# Altium PCB 2014_CARTE_PUISSANCE.PCBDOC
Units mil, origin at the board's own origin, x right, y up, seen from the top; angles counter-clockwise.
Board outline 3149.61 x 1181.1 mil, 4 copper layers (1-TOP, 2-PSSCE, 3-GND, 4-BOTTOM); 30 components, 19 nets, 83 pads, 90 vias.
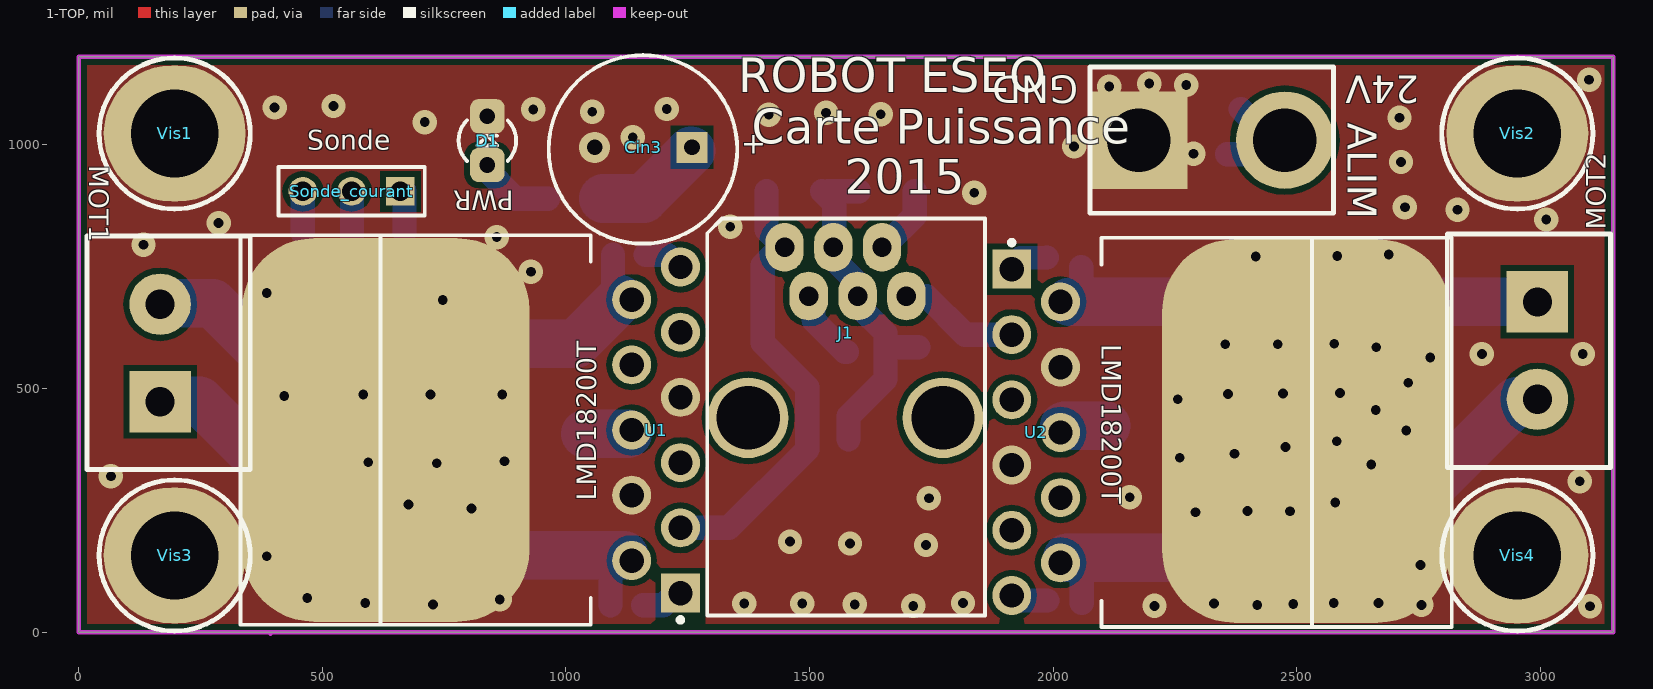
[diagram p0: 1-TOP view]
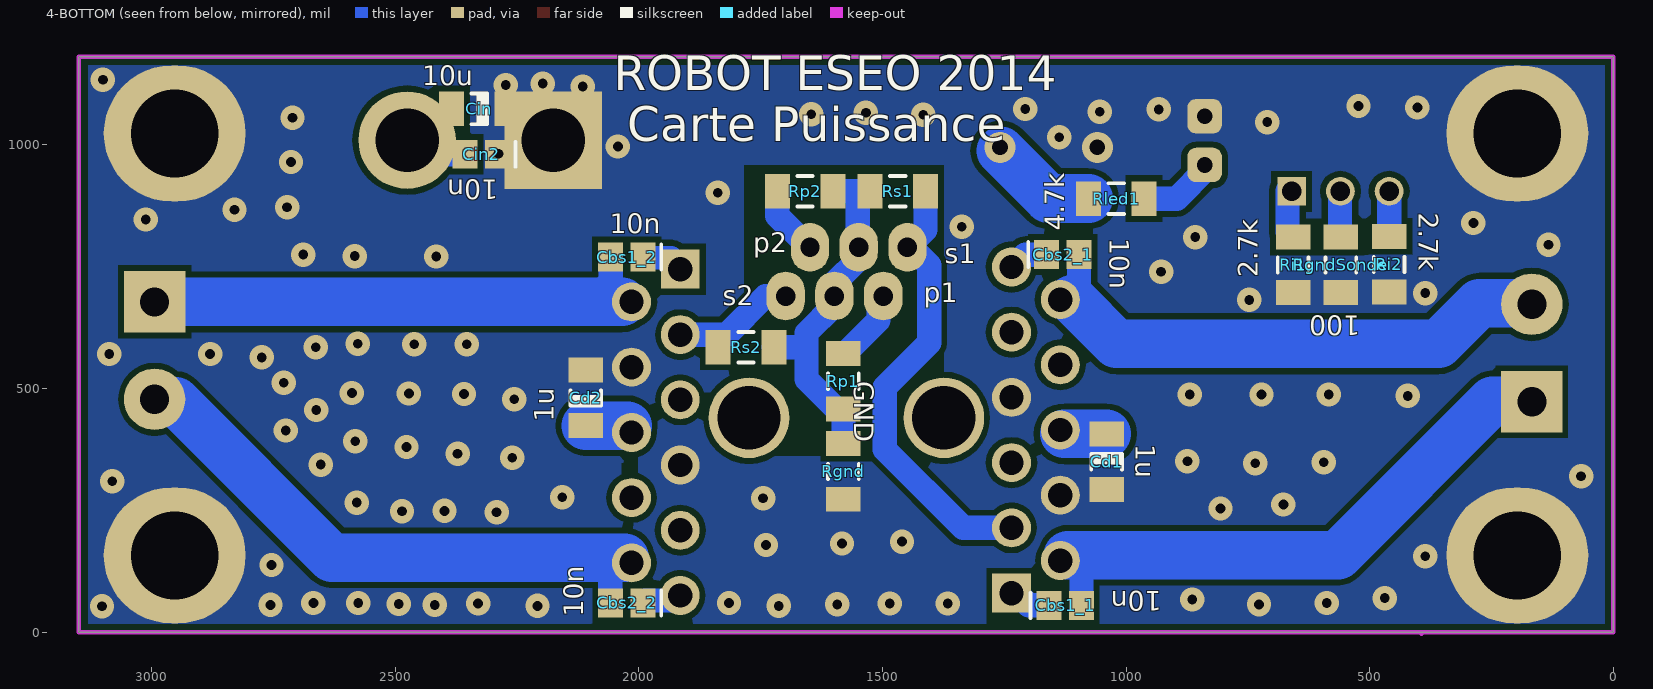
[diagram p1: 4-BOTTOM view, seen from below]
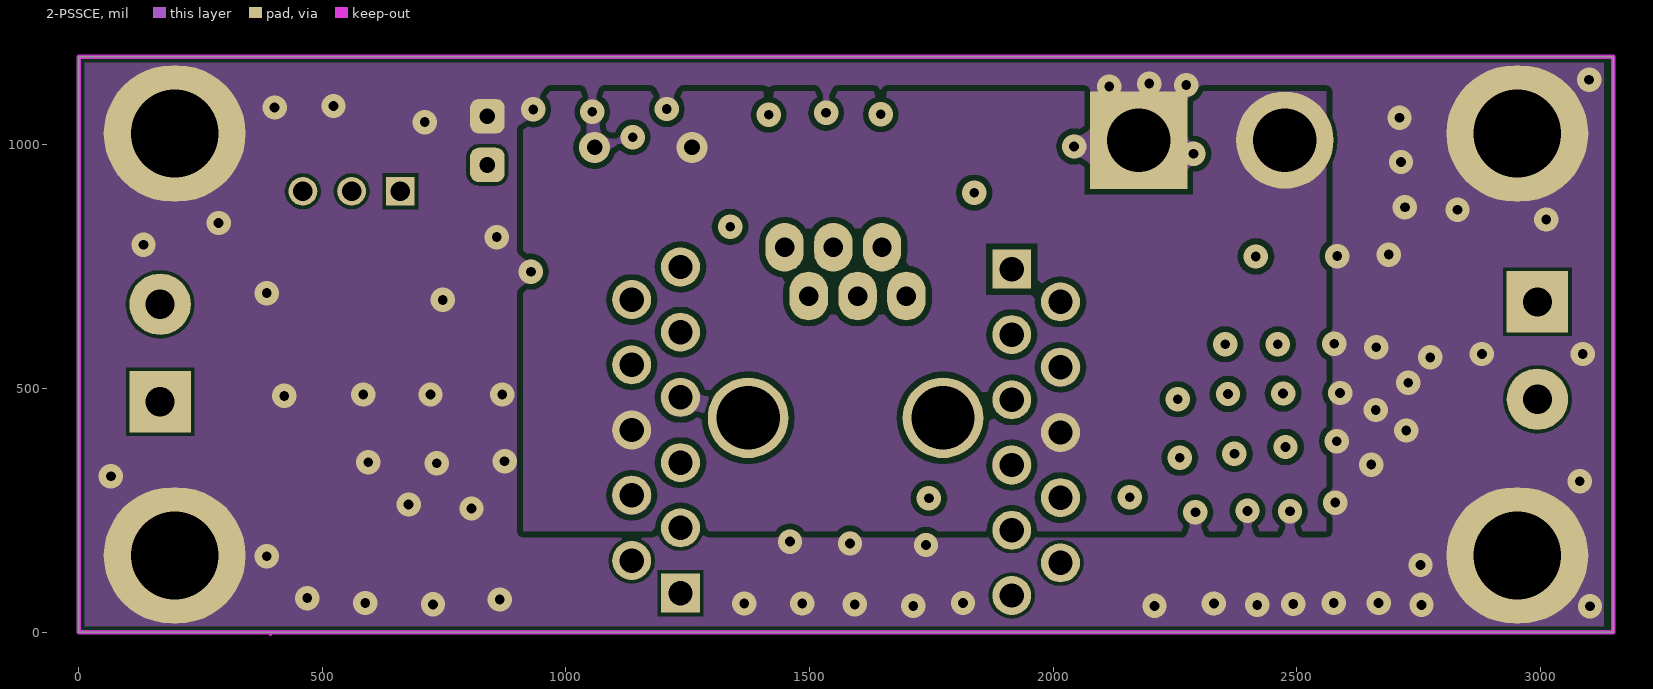
[diagram p2: 2-PSSCE]
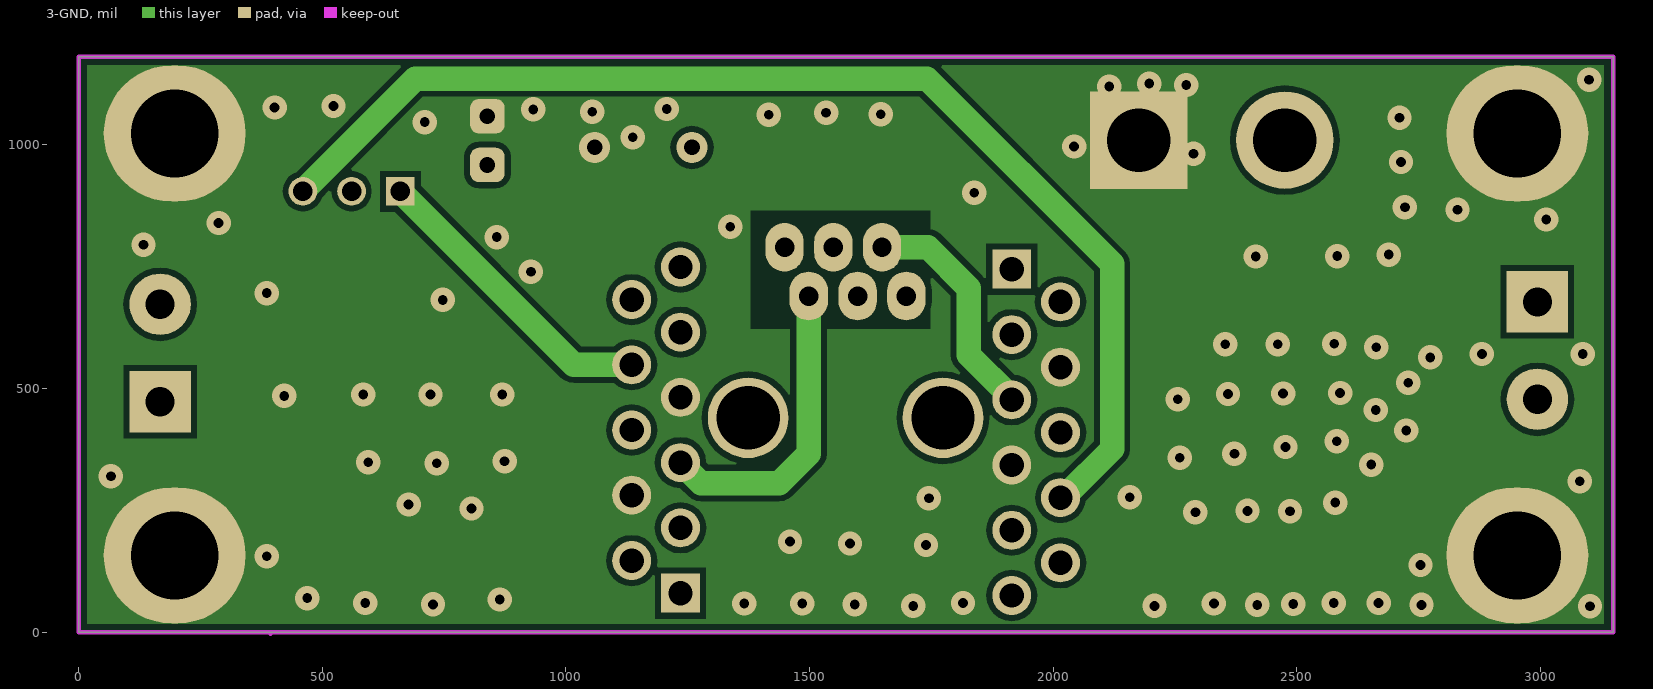
[diagram p3: 3-GND]
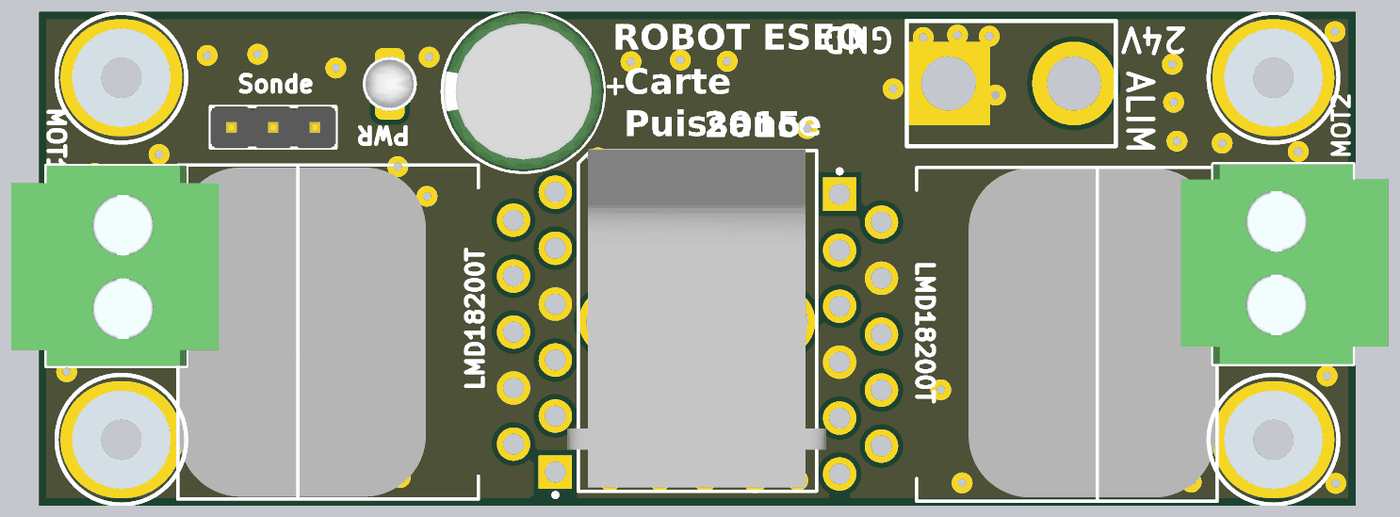
[diagram p4: 3D render of the assembled board from above, using the file's embedded part models]
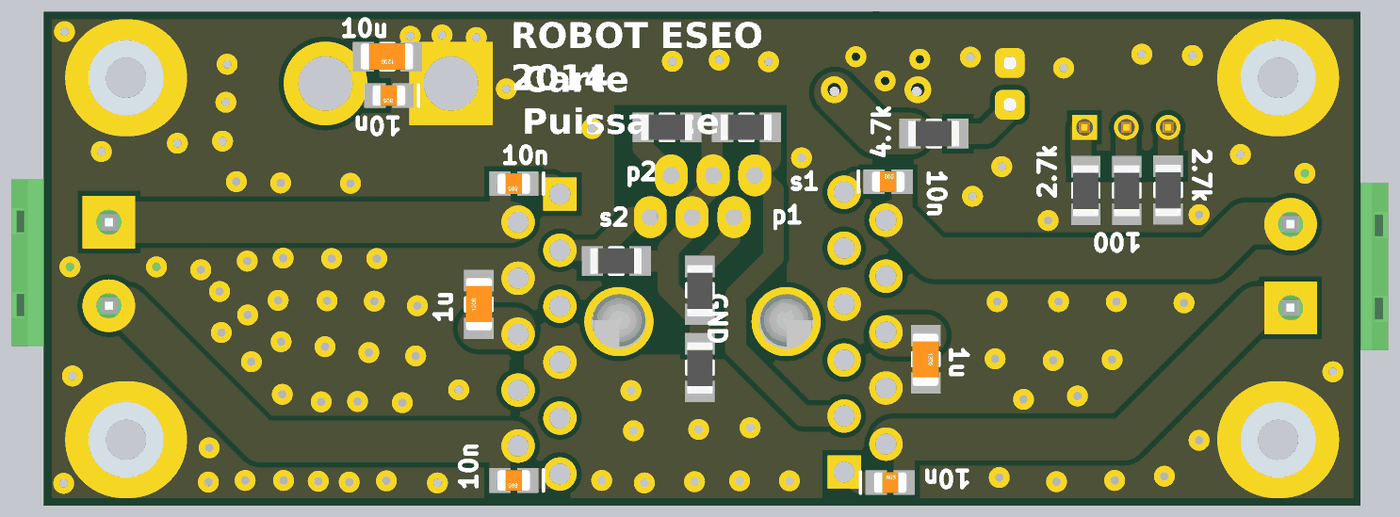
[diagram p5: 3D render of the assembled board from below, using the file's embedded part models]

## Layer stack, top to bottom
Top Solder: solder mask 0.4, Solder Resist, Dk 3.5
1-TOP: signal copper 1.4
Dielectric1: prepreg 12.6, FR-4, Dk 4.8
2-PSSCE: signal copper 1.4
Dielectric2: core 12.6, FR-4, Dk 4.8
3-GND: signal copper 1.4
Dielectric3: prepreg 12.6, FR-4, Dk 4.8
4-BOTTOM: signal copper 1.4
Bottom Solder: solder mask 0.4, Solder Resist, Dk 3.5

## Board outline
0,0 3149.61,0 3149.61,1181.1 0,1181.1

## Design rules (kind name [scope] priority, off if disabled: settings)
Clearance Clearance_2 [InNamedPolygon('2-MOT1_1') Or  InNamedPolygon('1-GND') Or  InNamedPolygon('3-GND') Or  InNamedPolygon('2-MOT1_2') Or  InNamedPolygon('2-MOT2_1') Or  InNamedPolygon('2-MOT2_2') Or  InNamedPolygon('4-GND') Or  InNamedPolygon('2-24V')] p1: gap=12
Clearance Clearance_1 [InNamedPolygon('2-MOT1_1') Or  InNamedPolygon('2-24V') Or  InNamedPolygon('2-MOT2_1') Or  InNamedPolygon('2-MOT2_2') Or  InNamedPolygon('2-MOT1_2')] p2: gap=12
Clearance [All] p3: gap=7
FabricationTestPointUsage TestPointUsage [All] p1: valid=0 allowmultiple=FALSE
FabricationTestpoint Testpoint [All] p1: side=3 testpointundercomponent=TRUE minsize=40 maxsize=100 preferedsize=60 minholesize=0 maxholesize=40 preferedholesize=32 testpointgrid=1 allowsidetop=TRUE allowsidebottom=TRUE usegrid=TRUE gridtolerance=0.01
Height [All] p1: minheight=0 maxheight=3000 prefheight=500
PlaneClearance [All] p1: clearance=10
PlaneConnect [All] p1: planeconnectstyle=Direct reliefexpansion=25 reliefentries=4 reliefconductorwidth=12 reliefairgap=15
PolygonConnect [All] p1: connectstyle=Direct reliefconductorwidth=10 reliefentries=4 polygonreliefangle="90 Angle" airgapwidth=10
RoomDefinition 2014_CARTE_PUISSANCE [InComponentClass('2014_CARTE_PUISSANCE')] p1: confinementstyle=ConfineIn formatcopy=TRUE lockcomponents=FALSE outline 3194.6,56 3664.6,56 3664.6,562 3194.6,562
RoutingLayers RoutingLayers_1 [All] p1: top layer_v5=TRUE mid layer 1_v5=FALSE mid layer 2_v5=FALSE bottom layer_v5=TRUE
RoutingLayers [All] p2: top layer_v5=TRUE mid layer 1_v5=FALSE mid layer 2_v5=FALSE bottom layer_v5=TRUE
RoutingVias [All] p1: holewidth=28 width=50 viastyle="Through Hole" minholewidth=28 minwidth=50 maxholewidth=28 maxwidth=50
SilkToSolderMaskClearance SilkscreenOverComponentPads [IsPad] p1: minsilkscreentomaskgap=10 clearancetoexposedcopper=TRUE
SolderMaskExpansion [All] p1: expansion=0
Width [All] p1: maxlimit=150 minlimit=10 preferedwidth=15
22 further rules are at their usual default settings.

## Components (designator, comment, footprint, x,y, rotation, side; value= is the part's Value field where it differs from the comment)
ALIM "BORNIER2" BORNIER2 2275.7,1010 r0 top
Cbs1_1 "10nF" C0805_N 1125,55 r180 bottom
Cbs1_2 "10nF" C0805_N 2025,770 r0 bottom
Cbs2_1 "10nF" C0805_N 1130,775 r180 bottom
Cbs2_2 "10nF" C0805_N 2025,60 r0 bottom
Cd1 "1uF" C1206_N 1040,350 r270 bottom
Cd2 "1uF" C1206_N 2109,481 r90 bottom
Cin "10uF" C1206_N 2327.7,1074 r0 bottom
Cin2 "10nF" C0805_N 2323.7,981 r0 bottom
Cin3 "CONDENSATEUR_POL_ELECTROLY_RAD_5.08/8.9" CONDENSATEUR_POLARISE_ELECTROLYTIQUE_RADIAL_5.08/8.9 1258.7,995 r180 top
D1 "LED" LED_3mm 838.7,1009 r0 top
J1 "RJ12_6/6" RJ12_6/6 1648.7,790 r270 top
MOT1 "BORNIER2" BORNIER_2V_5.08MM 167,473 r90 top
MOT2 "BORNIER2" BORNIER_2V_5.08MM 2994,678 r270 top
Rgnd "100" R1206_N 1580,330 r270 bottom
RgndSonde "100" R1206_N 559,754 r270 bottom
Ri1 "2.7k_1%" R1206_N 657,754 r270 bottom
Ri2 "2.7k_1%" R1206_N 460,755 r270 bottom
Rled1 "4,7k" R1206_N 1020,890 r0 bottom
Rp1 "10k" R1206_N 1580,515 r270 bottom
Rp2 "10k" R1206_N 1658.7,905 r0 bottom
Rs1 "10k" R1206_N 1468.7,905 r0 bottom
Rs2 "10k" R1206_N 1780,585 r0 bottom
Sonde_courant "Header 3" HDR1X3 660,905 r180 top
U1 "LMD18200T" TA11B 1135,415 r90 top
U2 "LMD18200T" TA11B 2015,410 r270 top
Vis1 "Entretoise WURTH CMS" ENTRETOISE_CMS 196.85,1023.62 r0 top
Vis2 "Entretoise WURTH CMS" ENTRETOISE_CMS 2952.76,1023.62 r0 top
Vis3 "Entretoise WURTH CMS" ENTRETOISE_CMS 196.85,157.48 r0 top
Vis4 "Entretoise WURTH CMS" ENTRETOISE_CMS 2952.76,157.48 r0 top

## Footprints (in the part's own frame and the unit in brackets; to place one, negate y for a bottom-side part, rotate by r counter-clockwise, add the part's x,y. Pads: shape width x height; smd on the part's side, far side on the other; paste and mask are expansions set on the pad)
BORNIER2 [mil] "Connector; Header; 2 Position; screw terminal blocks, Pin Spacing=5.08mm"
  rect 200x200 hole 130: 1(-100,0)
  round 200 hole 130: 2(200,0)
  silkscreen extent -200,-150 300,150, body extent -105,-155 305,155, height 394
BORNIER_2V_5.08MM [mm] "Connector; Header; 2 Position; screw terminal blocks, Pin Spacing=5.08mm"
  rect 3.2x3.2 hole 1.524: 1(0,0)
  round 3.2 hole 1.524: 2(5.08,0)
  silkscreen extent -3.53,-4.7 8.64,3.81, body extent -3.53,-6.68 8.63,5.92, height 29.9
C0805_N [mm] "Chip Capacitor, Body 2.0x1.3mm, IPC Medium Density"
  rect 1.3x1.5 smd: 1(-0.85,0) 2(0.85,0)
  silkscreen extent -1.8,-0.65 -1.8,0.65, body extent -0.99,-0.63 1.01,0.63, height 0.8
C1206_N [mm] "Chip Capacitor, Body 3.2x1.6mm, IPC Medium Density"
  rect 1.3x1.8 smd: 1(-1.45,0) 2(1.45,0)
  silkscreen extent -0.4,-0.8 0.4,0.8, body extent -1.57,-0.81 1.63,0.79, height 1.02
CONDENSATEUR_POLARISE_ELECTROLYTIQUE_RADIAL_5.08/8.9 [mil] "CONDENSATEUR_POLARISE_ELECTROLYTIQUE_RADIAL ; DIAMETRE : 8.9mm ; ESPACEMENT BROCHES : 5.08mm"
  rect 64x64 / inner round 64 / far side round 64 hole 32: 1(0,0)
  round 64 hole 32: 2(200,0)
  silkscreen extent -93,-190 294,197, body extent -93,-188 291,196, height 485
ENTRETOISE_CMS [mm] "Entretoise CMS Wurth trou 4.4mm"
  oval 7.4x7.1 hole 4.572: 1(0,0)
  silkscreen extent -3.94,-3.94 3.94,3.94, body extent -2.99,-3 2.99,2.98, height 3
HDR1X3 [mm]
  rect 1.5x1.5 hole 1.016: 1(0,0)
  round 1.5 hole 1.016: 2(2.54,0) 3(5.08,0)
  silkscreen extent -1.27,-1.27 6.35,1.27, body extent -1.27,-1.27 6.35,1.27, height 10.1
LED_3mm [mm] "LED 3mm; 2 Leads"
  rrect50% 1.8x1.8 hole 0.813: 1(0,-1.27) 2(0,1.27)
  silkscreen extent -1.5,-1.06 1.5,1.06, body extent -1.64,-1.65 1.65,1.65, height 5.51
R1206_N [mm] "Chip Resistor, Body 3.2x1.6mm, IPC Medium Density"
  rect 1.3x1.8 smd: 1(-1.45,0) 2(1.45,0)
  silkscreen extent -0.4,-0.8 0.4,0.8, body extent -1.68,-0.87 1.68,0.87, height 0.71
RJ12_6/6 [mm] "RJ12 ; 6P/6C ; BAS PROFIL ; COUDE ; ESPACEMENT BROCHES = 2.54 mm"
  oval 2.54x2 hole 1.016: 1(0,-5.08) 2(2.54,-3.82) 3(0,-2.54) 4(2.54,-1.27) 5(0,0) 6(2.54,1.27)
  round 4.2 hole 3.302: FIX1(8.89,3.18) FIX2(8.89,-6.98)
  silkscreen extent -1.51,-9.11 19.2,5.37, body extent -1.6,-9.8 18.97,5.95, height 16
TA11B [mil] "TO, Thru-Hole, Vertical, Heatsink Mounted; 11 Bent Staggered Leads; Pitch 1.7 mm"
  rect 80x80 hole 50: 1(-335,-100)
  round 80 hole 50: 2(-268,0) 3(-200.79,-100) 4(-133.86,0) 5(-66.93,-100) 6(0,0) 7(66.93,-100) 8(133.86,0) 9(200.79,-100) 10(267.72,0) 11(334.65,-100)
  silkscreen extent -400,-105 400,803, body extent -400,84 400,269, height 827

## Part data
ALIM MOT1 MOT2: "Terminal blocks, 2 pins, pitch=5mm"
Cbs1_1 Cbs1_2 Cbs2_1 Cbs2_2 Cd1 Cd2 Cin Cin2: library part Capacitor, "Capacitor"
Cin3: "CONDENSATEUR POLARISE ELECTROLYTIQUE RADIAL 5.08/8.9"
D1: "Typical LED"
J1: "EMBASE RJ12_6/6 COUDEE"
Rgnd RgndSonde Ri1 Ri2 Rled1 Rp1 Rp2 Rs1 Rs2: library part Resistor, "Resistor"
Sonde_courant: "Header, 3-Pin"
U1 U2: "3A, 55V H-Bridge"
Vis1 Vis2 Vis3 Vis4: "Entretoise Wurth"

## Free pads (board coordinates)
  rrect50% 590.55x787.4 smd: GND(630,415) GND(2519,413)

## Via types
v1: diameter 50, hole 20, 1-TOP to 4-BOTTOM, 90 vias

## Nets (pads, with @x,y where several pads share a name; then routed paths per layer and width w, separated by ;. In a path a pad name is that pad's centre, name@x,y a point inside that pad or via, vN(x,y) a via of type N, cw(c..) or ccw(c..) an arc to the next point about the centre after c; other vN are vias at no path point)
24V: ALIM.2 Cd1.1 Cd2.1 Cin2.2 Cin3.1 Cin.2 Rled1.2 U1.6 U2.6 | length 575.6
  4-BOTTOM w50: Cin2.2 ALIM.2@2450,981 ; Cin.2 ALIM.2@2448,1010.79
  4-BOTTOM w100: Cd1.1 U1.6@1126.91,407.09 ; Rled1.2 1159,890 Cin3.1@1257,988 ; U2.6@2023.09,423.91 Cd2.1
GND: ALIM.1 Cd1.2 Cd2.2 Cin2.1 Cin3.2 Cin.1 D1.2 pad.GND Rgnd.2 RgndSonde.2 Ri1.2 Ri2.2 U1.4 U1.7 U2.4 U2.7 Vis1.1 Vis2.1 Vis3.1 Vis4.1
  other v1: 3102,53 1713,54 2208,54 2419,56 2756,56 727,57 1593,57 2493,58 1366,59 1485,59 2330,59 588,60 1815,60 2576,60 2668,60 864,67 469,70 2754,138 386,156 1739,179 1583,182 1460,186 2292,246 2486,248 2399,249 806,254 677,262 2579,266 1745,275 2157,277 3081,310 66,320 2653,344 735,347 594,349 874,351 2260,358 2372,366 2477,380 2582,392 2725,414 2662,456 2256,478 422,485 584,488 722,488 869,488 2359,489 2472,490 2589,491 2729,512 2774,564 2880,571 3087,571 2663,585 2353,591 2461,591 2577,592 747,682 386,696 928,740 2416,771 2583,772 2689,775 133,795 858,811 1337,832 287,840 3012,847 2830,867 2722,872 1838,902 2714,965 2288,982 2043,997 1137,1016 710,1047 2711,1056 1416,1062 1646,1063 1534,1066 1054,1068 933,1073 1207,1074 402,1077 523,1080 2115,1120 2273,1123 2197,1126 3100,1134
GND_CDE: J1.3 J1.4 Rgnd.1 Rp1.2 Rp2.1 Rs1.2 Rs2.1 | length 693.7
  4-BOTTOM w50: Rs1.2 1551,879.79 1551,764 J1.4@1598,717 ; Rs1.2@1538,905 Rp2.1 ; Rgnd.1@1580,396 1580,443 1656,519 1656,614 1598.7,671.3 J1.4 ; 1660,585 Rs2.1
I_SONDE_1: Ri1.1 Sonde_courant.1 U1.8 | length 710.8
  3-GND w50: Sonde_courant.1 1016,549 U1.8@1138,549
  4-BOTTOM w50: Ri1.1@668.7,820.7 Sonde_courant.1@668.7,906
I_SONDE_2: Ri2.1 Sonde_courant.3 U2.8 | length 2520.4
  3-GND w50: Sonde_courant.3 691,1136 1741,1136 2121,756 2121,376 U2.8@2023,278
  4-BOTTOM w50: Ri2.1@459.7,819.3 Sonde_courant.3@459.7,907
MOT1_1: Cbs1_1.2 MOT1.1 U1.2 | length 1182.4
  4-BOTTOM w50: Cbs1_1.2 1091.54,117.54 U1.2@1116,142
  4-BOTTOM w100: MOT1.1@165,475 248,475 565,158 U1.2@1119,158
MOT1_2: Cbs2_1.2 MOT1.2 U1.10 | length 1118.2
  4-BOTTOM w50: Cbs2_1.2 1096.54,709.46 U1.10@1121,685
  4-BOTTOM w100: MOT1.2@165,675 275,675 358,592 1020,592 U1.10@1111,683
MOT2_1: Cbs1_2.2 MOT2.1 U2.2 | length 1067.7
  4-BOTTOM w50: U2.2 2034,678 2067,711 ; 2058,711 Cbs1_2.2@2058,749
  4-BOTTOM w100: U2.2@2034,678 MOT2.1@2998,678
MOT2_2: Cbs2_2.2 MOT2.2 U2.10 | length 1189.8
  4-BOTTOM w50: U2.10@2025,141 U2.10@2035,141 ; U2.10@2030,146 2058.46,117.54 Cbs2_2.2
  4-BOTTOM w100: U2.10@2029,153 2630,153 2951,474 MOT2.2@2978,474
NetCbs1_1_1: Cbs1_1.1 U1.1 | length 78.3
  4-BOTTOM w50: Cbs1_1.1 1200,55 U1.1@1226,81
NetCbs1_2_1: Cbs1_2.1 U2.1 | length 82.8
  4-BOTTOM w50: U2.1 1934,768 Cbs1_2.1@1987,769
NetCbs2_1_1: Cbs2_1.1 U1.11 | length 74.6
  4-BOTTOM w50: Cbs2_1.1 1207,775 U1.11@1229,753
NetCbs2_2_1: Cbs2_2.1 U2.11 | length 64.7
  4-BOTTOM w50: U2.11@1927,74 1936,65 Cbs2_2.1@1988,65
NetD1_1: D1.1 Rled1.1 | length 156
  4-BOTTOM w50: D1.1@833,953 896,890 Rled1.1
NetRgndSonde_1: RgndSonde.1 Sonde_courant.2 | length 94.7
  4-BOTTOM w50: RgndSonde.1@560.7,811.3 Sonde_courant.2@560.7,906
PWM1: J1.2 Rp1.1 U1.5 | length 770.2
  3-GND w50: U1.5 1277.07,306 1438,306 1498,366 J1.2@1498,682
  4-BOTTOM w50: J1.2 1508,680.31 1508,640 1573,575 Rp1.1@1576,575
PWM2: J1.5 Rp2.2 U2.5 | length 605.1
  3-GND w50: J1.5 1743,790 1827,706 1827,569 U2.5@1914,482
  4-BOTTOM w50: J1.5@1658,797 1715.79,854.79 Rp2.2
SENS1: J1.1 Rs1.1 U1.3 | length 920.4
  4-BOTTOM w50: U1.3 1334.21,214.21 1495,375 1495,503 1404,594 1404,753 J1.1@1444,793 ; Rs1.1 1411.61,826.39 J1.1@1442,796
SENS2: J1.6 Rs2.2 U2.3 | length 249.1
  4-BOTTOM w50: J1.6 1740,690 1819.21,610.79 U2.3
pads on no net: J1.FIX1 J1.FIX2 U1.9 U2.9

## Polygon pours and split planes (outlines as drawn)
24V on 2-PSSCE "2-24V" (solid, remove dead copper, pour order 1000): 912,1110 2560.35,1110 2560.35,207 912,207
GND on 2-PSSCE "2-GND" (solid, remove dead copper, pour order 1002): 0,1176 3130,1176 3130,0 0,0
GND on 1-TOP "1-GND" (solid, remove dead copper, pour order 1001): 0,1174 3131,1174 3131,0 0,0
GND on 3-GND "3-GND" (solid, remove dead copper, pour order 1003): 0,1176 3130,1176 3130,0 0,0
GND on 4-BOTTOM "4-GND" (solid, remove dead copper, pour order 1004): 0,1175 3130,1175 3130,0 0,0

## Keep-outs
Keep-Out Layer:
  lines w10: 393.7,-2.5 395.7,-0.5 ; 0,0 3149.61,0 3149.61,1181.1 0,1181.1 0,0

## Other copper
3-GND:
  pour cut-out: 1748.2,623 1379.2,623 1379.2,865 1748.2,865
4-BOTTOM:
  pour cut-out: 1372.7,959 1784.7,959 1784.7,361 1372.7,361
  pour cut-out: 2001.7,348 2035.7,348 2035.7,262 2001.7,262

## Silkscreen, mask and mechanical layers (free items; w line width, h text height)
Top Overlay:
  text "GND" at 2051,1142 h56.25 r180
  text "24V" at 2751,1142 h56.25 r180
  text "ROBOT ESEO" at 1354,1085 h120
  text "Sonde" at 469,990 h40
  text "Carte Puissance" at 1381,979 h120
  text "PWR" at 892.7,906 h40 r180
  text "2015" at 1572,876 h120
  text "LMD18200T" at 2100,591 h40 r270
  text "LMD18200T" at 1062,270 h40 r90
Bottom Overlay:
  text "10u" at 2445,1123 h40
  text "ROBOT ESEO 2014" at 2051,1089 h120
  text "Carte Puissance" at 2024,984 h120
  text "10n" at 2289,929 h40 r180
  text "2.7k" at 399,861 h40 r90
  text "4.7k" at 1127,824 h40 r270
  text "10n" at 2060,819 h40
  text "10n" at 1033,809 h40 r90
  text "p2" at 1764.7,780 h40
  text "s1" at 1372,757 h40
  text "2.7k" at 730,729 h40 r270
  text "p1" at 1415.7,677 h40
  text "s2" at 1827.7,671 h40
  text "100" at 519,650 h40 r180
  text "GND" at 1557.7,515 h40 r90
  text "1u" at 2175,432 h40 r270
  text "1u" at 980,386 h40 r90
  text "10n" at 927,84 h40 r180
  text "10n" at 2114,32 h40 r270
Mechanical 15:
  text "Modifs 2014->2015" at 380,2132 h60
  text "Borniers a vis moteurs -> embase + femelle" at 579,1983 h60
  text "Diametres percages LMD18200T : 40->50 mils" at 570,1826 h60
  text "Vis -> Entretoises Wurths" at 551,1658 h60

## Text inside footprints (layer, text, board x,y; h text height)
Cin3: Top Overlay "+" at 1411.46,1020.2 h45 r180